# Altium PCB Alarm system.PcbDoc
Units mm, origin at the board's own origin, x right, y up, seen from the top; angles counter-clockwise.
Board outline 55 x 35 mm, 2 copper layers (Top Layer, Bottom Layer); 31 components, 37 nets, 124 pads, 53 vias.
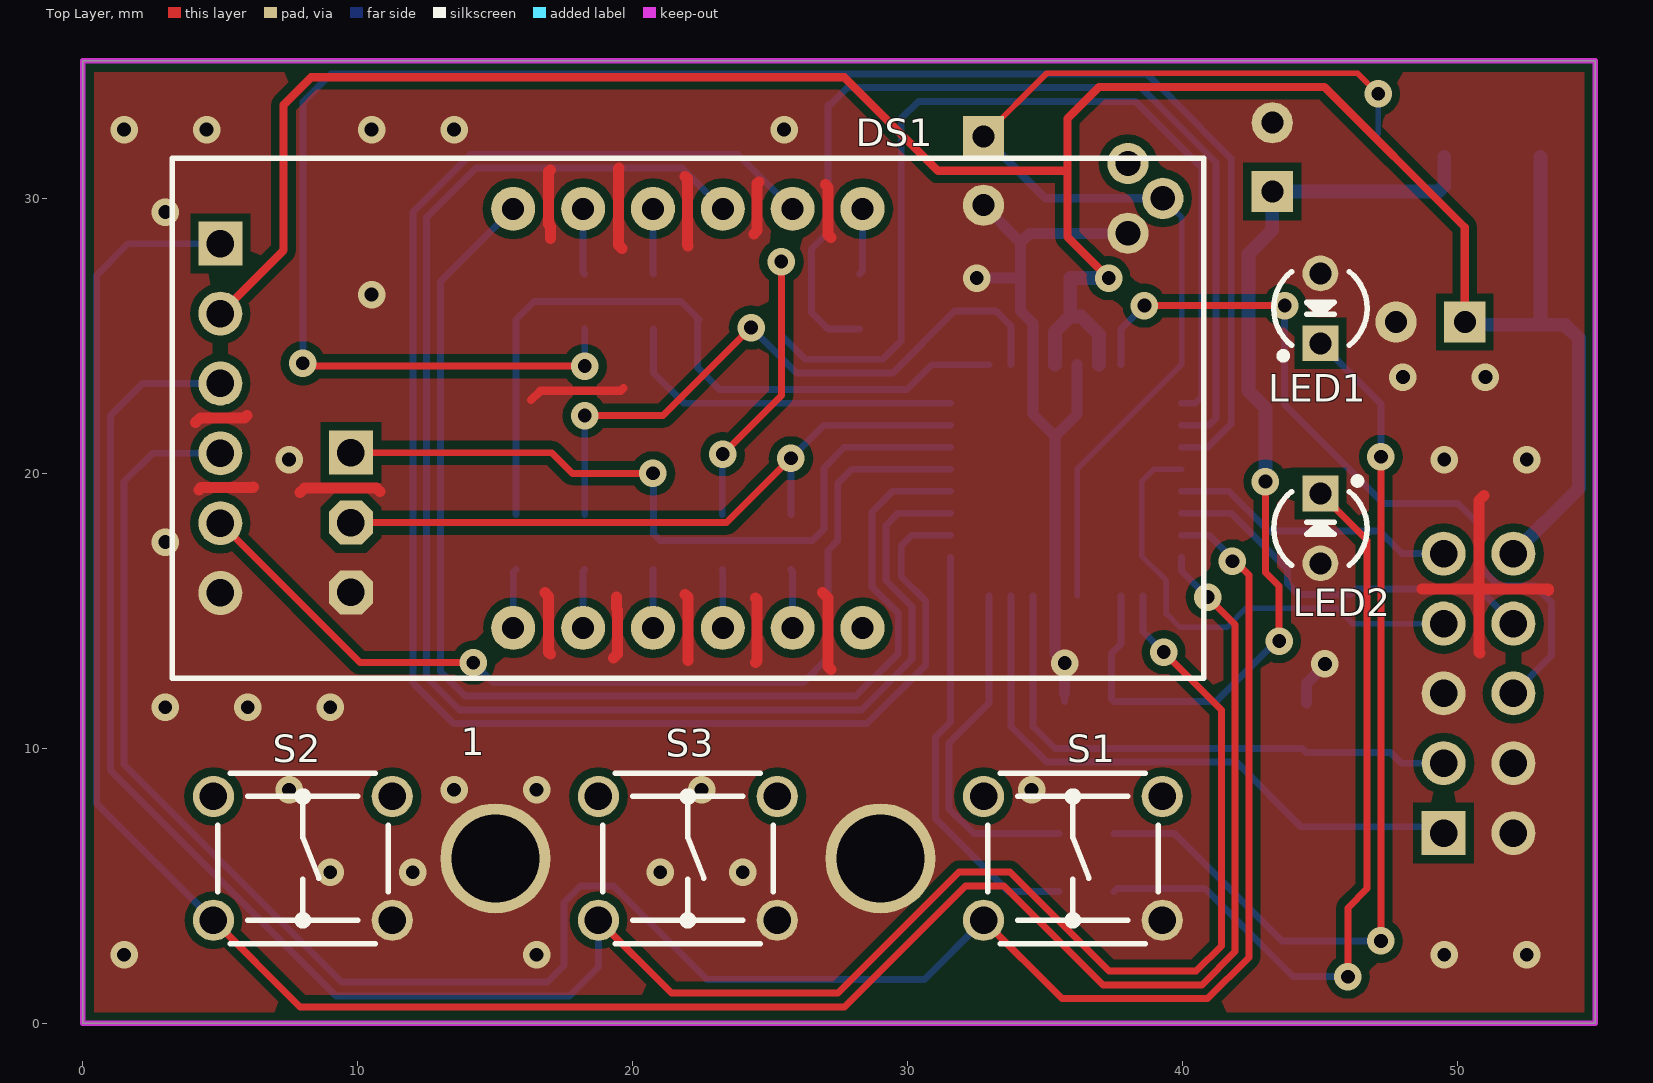
[diagram p0: Top Layer view]
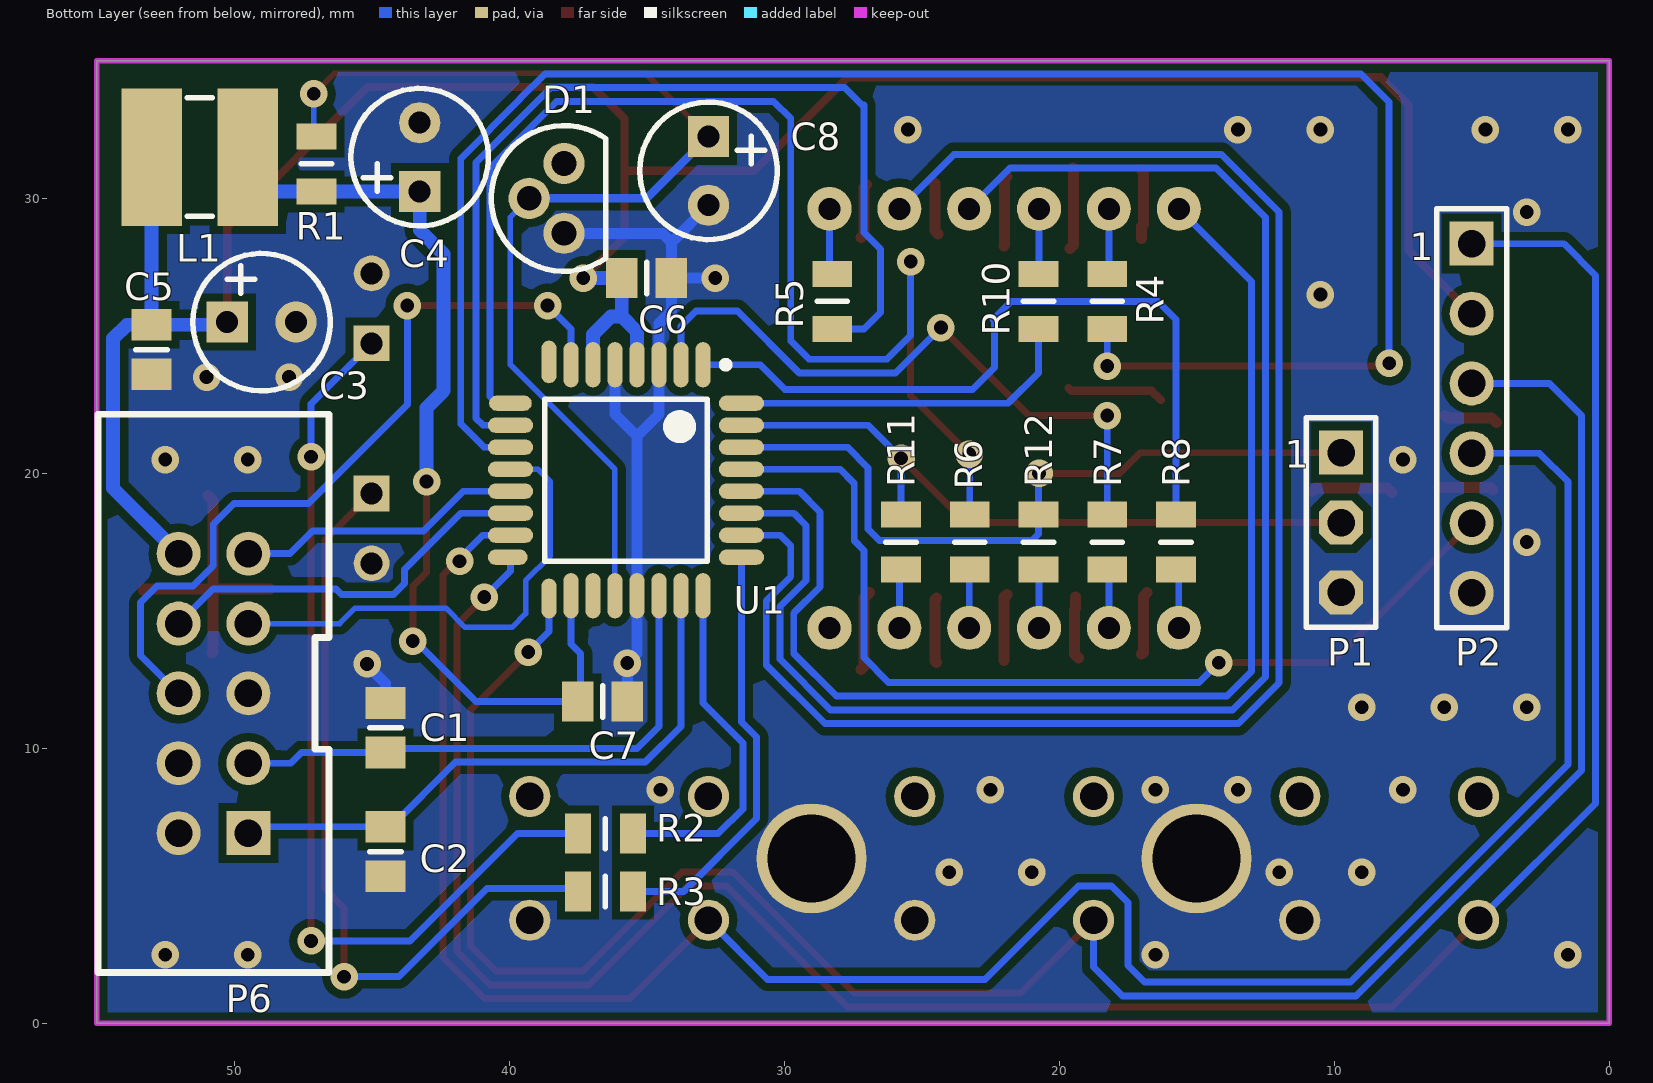
[diagram p1: Bottom Layer view, seen from below]
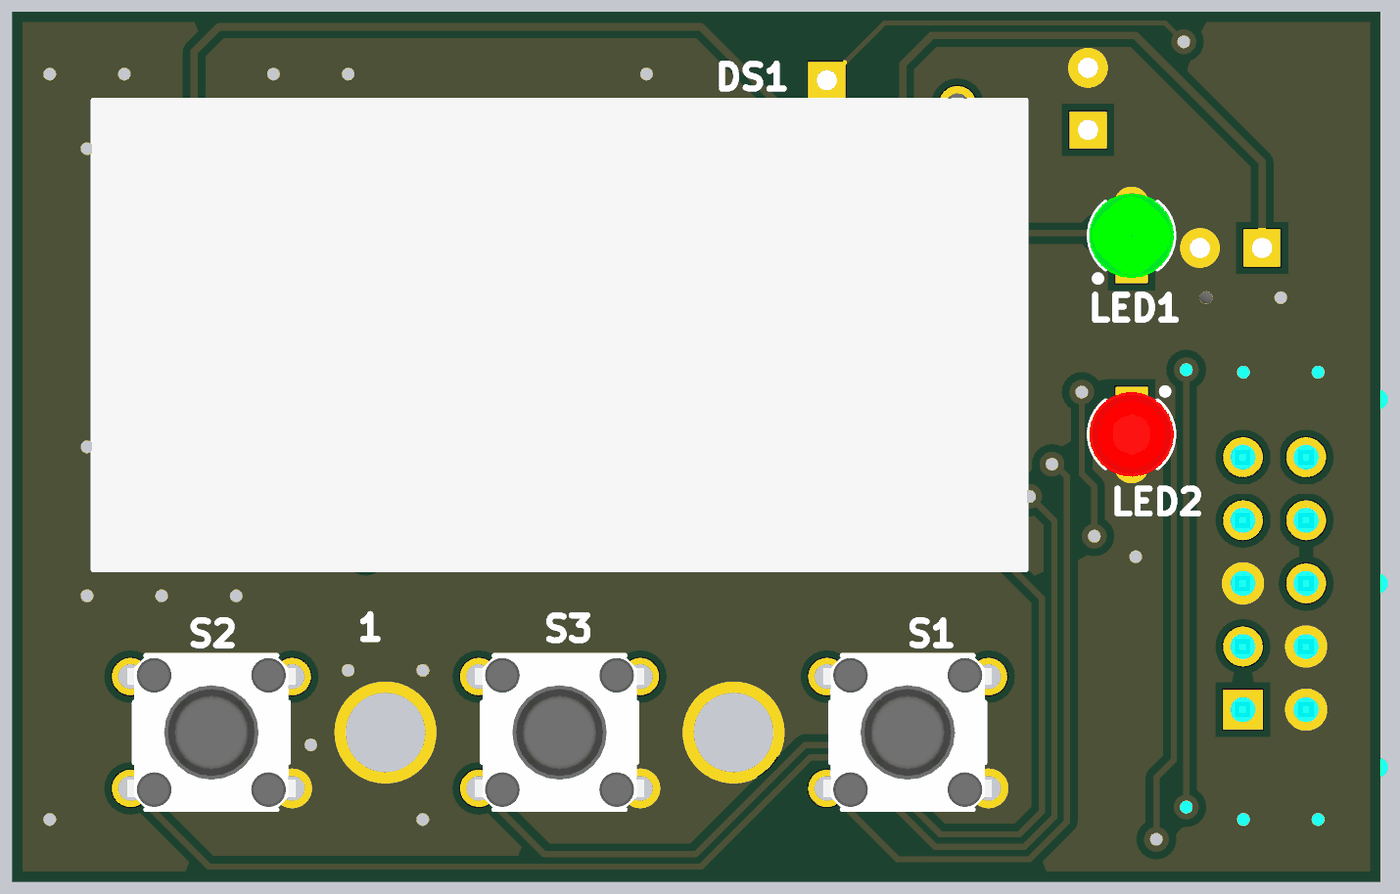
[diagram p2: 3D render of the assembled board from above, using the file's embedded part models]
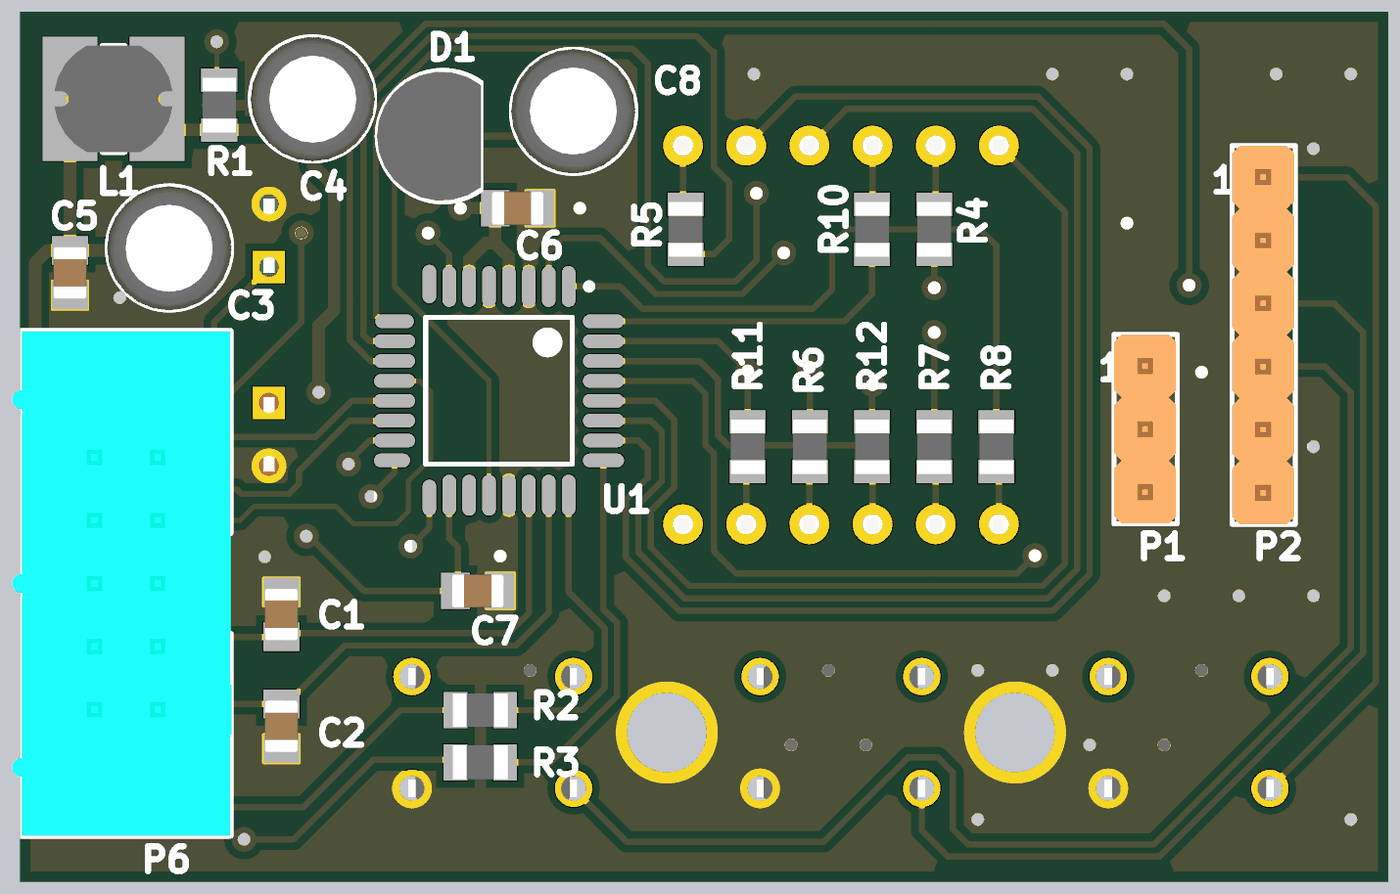
[diagram p3: 3D render of the assembled board from below, using the file's embedded part models]

## Layer stack, top to bottom
Top Solder: solder mask 0.0102, Solder Resist, Dk 3.5
Top Layer: signal copper 0.0356
Dielectric1: dielectric 0.32, FR-4, Dk 4.8
Bottom Layer: signal copper 0.0356
Bottom Solder: solder mask 0.0102, Solder Resist, Dk 3.5

## Board outline
0,0 55,0 55,35 0,35

## Design rules (kind name [scope] priority, off if disabled: settings)
Clearance [All] p1: gap=0.25 except(0.3: Arc-Poly Track-Poly SMDPad-Poly THPad-Poly Via-Poly Fill-Poly Poly-Poly)
ComponentClearance [All] p1 off: gap=0.254 collisioncheckmode=3 verticalgap=0.254 showdistances=FALSE
Height [All] p1: minheight=0 maxheight=30 prefheight=12.7
MinimumSolderMaskSliver [All] p1: minsoldermaskwidth=0.1
PolygonConnect [All] p1: connectstyle=Direct reliefconductorwidth=0.254 reliefentries=4 polygonreliefangle="90 Angle" airgapwidth=0.254
RoutingVias [All] p1: holewidth=0.5 width=1 viastyle="Through Hole" minholewidth=0.5 minwidth=1 maxholewidth=0.711 maxwidth=1.27
SilkToSilkClearance [All] p1 off: silktosilkclearance=0.1
SilkToSolderMaskClearance SilkscreenOverComponentPads [IsPad] p1 off: minsilkscreentomaskgap=0.05 clearancetoexposedcopper=TRUE
SolderMaskExpansion [All] p1: expansion=0.05
Width [All] p1: maxlimit=2 minlimit=0.2 preferedwidth=0.35 minimp=50.000000 maximp=50.000000 favimp=50.000000
25 further rules are at their usual default settings.

## Components (designator, comment, footprint, x,y, rotation, side; value= is the part's Value field where it differs from the comment)
C1 "0805" CAPC2012X110N 44.5,10.75 r270 bottom
C2 "0805" CAPC2012X110N 44.5,6.25 r90 bottom
C3 "CAP_POL" CAPPR250-500X1100 49,25.5 r180 bottom
C4 "CAP_POL" CAPPR250-500X1100 43.25,31.5 r90 bottom
C5 "0805" CAPC2012X110N 53,24.5 r90 bottom
C6 "0805" CAPC2012X110N 35,27.1 r0 bottom
C7 "0805" CAPC2012X110N 36.6,11.7 r0 bottom
C8 "CAP_POL" CAPPR250-500X1100 32.75,31 r270 bottom
D1 "LM385Z-2.5" TO-92AA-P127 38,30 r90 bottom
DS1 "BT-M51DRD" BT-M51DRD 22,22 r0 top locked
L1 "22uH" IND_BOURNS_PM43 51.25,31.5 r0 bottom
LED1 "GREEN" LED_3MM_GREEN_1C-2A 45,26 r90 top locked
LED2 "RED" LED_3MM_RED_1C-2A 45,18 r270 top locked
P1 "UART" 961103-6404-AR 9.75,20.75 r270 bottom
P2 "ISP" 961106-6404-AR 5,22 r270 bottom
P6 "Header 5X2" 30310-6002HB 50.75,12 r90 bottom
R1 "0805" RESC2012X50N 47,31.25 r90 bottom
R2 "0805" RESC2012X50N 36.5,6.9 r0 bottom
R3 "0805" RESC2012X50N 36.5,4.8 r0 bottom
R4 "0805" RESC2012X50N 18.25,26.25 r90 bottom
R5 "0805" RESC2012X50N 28.25,26.25 r90 bottom
R6 "0805" RESC2012X50N 23.25,17.5 r270 bottom
R7 "0805" RESC2012X50N 18.25,17.5 r270 bottom
R8 "0805" RESC2012X50N 15.75,17.5 r270 bottom
R10 "0805" RESC2012X50N 20.75,26.25 r90 bottom
R11 "0805" RESC2012X50N 25.75,17.5 r270 bottom
R12 "0805" RESC2012X50N 20.75,17.5 r270 bottom
S1 "PLUS" PB_OMRON_B3F-1070 36,6 r180 top locked
S2 "MINUS" PB_OMRON_B3F-1070 8,6 r180 top locked
S3 "SEL/OK" PB_OMRON_B3F-1070 22,6 r180 top locked
U1 "ATmega8A-AU" 32A_N 35.75,19.75 r270 bottom

## Footprints (in the part's own frame and the unit in brackets; to place one, negate y for a bottom-side part, rotate by r counter-clockwise, add the part's x,y. Pads: shape width x height; smd on the part's side, far side on the other; paste and mask are expansions set on the pad)
32A_N [mm] "Thin QFP, 32-Leads, Body 7x7mm, Pitch 0.8mm, IPC Medium Density"
  oval 1.65x0.55 smd: 1(-4.2,2.8) 2(-4.2,2) 3(-4.2,1.2) 4(-4.2,0.4) 5(-4.2,-0.4) 6(-4.2,-1.2) 7(-4.2,-2) 18(4.2,-2) 19(4.2,-1.2) 20(4.2,-0.4) 21(4.2,0.4) 22(4.2,1.2) 23(4.2,2) 24(4.2,2.8)
  oval 1.55x0.55 smd: 8(-4.3,-2.8)
  oval 0.55x1.55 smd: 9(-2.8,-4.2)
  oval 0.55x1.65 smd: 10(-2,-4.2) 11(-1.2,-4.2) 12(-0.4,-4.2) 13(0.4,-4.2) 14(1.2,-4.2) 15(2,-4.2) 25(2.8,4.2) 26(2,4.2) 27(1.2,4.2) 28(0.4,4.2) 29(-0.4,4.2) 30(-1.2,4.2) 31(-2,4.2) 32(-2.8,4.2)
  oval 0.55x1.45 smd: 16(2.8,-4.3)
  oval 1.45x0.55 smd: 17(4.3,-2.8)
  silkscreen extent -4.32,-2.95 2.95,3.75, body extent -3.5,-3.5 3.5,3.5, height 1.2
30310-6002HB [mm] "10 Positions Header Connector 0.100\" (2.54mm) Through Hole Gold"
  rect 1.6x1.6 hole 1: 1(-5.08,-1.27)
  round 1.6 hole 1: 2(-5.08,1.27) 3(-2.54,-1.27) 4(-2.54,1.27) 5(0,-1.27) 6(0,1.27) 7(2.54,-1.27) 8(2.54,1.27) 9(5.08,-1.27) 10(5.08,1.27)
  silkscreen extent -10.15,-4.2 10.15,4.2, body extent -10.15,-4.25 10.14,4.56, height 8.89
961103-6404-AR [mm] "3 Positions Header, Unshrouded Connector 0.100\" (2.54mm) Through Hole Gold"
  rect 1.6x1.6 hole 1: 1(0,0)
  oct 1.6x1.6 hole 1: 2(2.54,0) 3(5.08,0)
  silkscreen extent -1.27,-1.27 6.35,1.27, body extent -1.27,-1.27 6.35,1.23, height 8.14
961106-6404-AR [mm] "6 Positions Header, Unshrouded Connector 0.100\" (2.54mm) Through Hole Gold"
  rect 1.6x1.6 hole 1: 1(-6.35,0)
  round 1.6 hole 1: 2(-3.81,0) 3(-1.27,0) 4(1.27,0) 5(3.81,0) 6(6.35,0)
  silkscreen extent -7.62,-1.27 7.62,1.27, body extent -7.62,-1.27 7.62,1.23, height 8.1
BT-M51DRD [mm]
  round 1.6 hole 0.8: 1(-6.35,-7.62) 2(-3.81,-7.62) 3(-1.27,-7.62) 4(1.27,-7.62) 5(3.81,-7.62) 6(6.35,-7.62) 7(6.35,7.62) 8(3.81,7.62) 9(1.27,7.62) 10(-1.27,7.62) 11(-3.81,7.62) 12(-6.35,7.62)
  silkscreen extent -18.75,-9.45 18.75,9.45, body extent -18.8,-9.5 18.8,9.5, height 8
CAPC2012X110N [mm] "Chip Capacitor, Body 2.0x1.25mm, IPC Medium Density"
  rect 1.15x1.45 smd: 1(-0.9,0) 2(0.9,0)
  silkscreen extent 0,-0.57 0,0.57, body extent -1.05,-0.67 1.05,0.68, height 1.1
CAPPR250-500X1100 [mm] "Capacitor, Radial, Pin spacing 2.5mm - Body Diameter 5.0mm X Body Height 11mm"
  rect 1.5x1.5 hole 0.8: 1(-1.25,0)
  round 1.5 hole 0.8: 2(1.25,0)
  silkscreen extent -2.5,-2.5 2.5,2.5, body extent -2.51,-2.51 2.49,2.49, height 10.9
IND_BOURNS_PM43 [mm] "SMD Inductor  Body Width 4.5mm Body Lenght 4mm Height 3.5mm"
  rect 2.2x5 smd: 1(-1.75,0) 2(1.75,0)
  silkscreen extent -0.45,-2.15 0.45,2.15, body extent -2.38,-2.15 2.38,2.15, height 3.5
LED_3MM_GREEN_1C-2A [mm] "LED, Green, Body Dia. 3.43 mm, Pin spacing 2.54mm"
  rect 1.3x1.3 hole 0.8: 1(-1.27,0)
  round 1.3 hole 0.8: 2(1.27,0)
  silkscreen extent -1.85,-1.7 1.34,1.7, body extent -1.71,-1.71 1.72,1.72, height 9.85
LED_3MM_RED_1C-2A [mm] "LED, Red, Body Dia. 3.43 mm, Pin spacing 2.54mm"
  rect 1.3x1.3 hole 0.8: 1(-1.27,0)
  round 1.3 hole 0.8: 2(1.27,0)
  silkscreen extent -1.85,-1.7 1.34,1.7, body extent -1.71,-1.71 1.72,1.72, height 9.85
PB_OMRON_B3F-1070 [mm] "6x6mm Model, Horizontal, Flat Plunger Type (without Ground Terminal) Pushbutton Switch, OMRON B3F Series"
  round 1.5 hole 1: 1(-3.25,2.25) 2(3.25,2.25) 3(-3.25,-2.25) 4(3.25,-2.25)
  silkscreen extent -3.1,-3.1 3.1,3.1, body extent -3.4,-3.1 3.4,3.1, height 9.5
RESC2012X50N [mm] "Chip Resistor, EIA 0805, Metric 2012, Body 2.0x1.25mm, IPC Medium Density"
  rect 0.95x1.45 smd: 1(-1,0) 2(1,0)
  silkscreen extent 0,-0.55 0,0.55, body extent -1.1,-0.67 1.1,0.68, height 0.5
TO-92AA-P127 [mm] "TO-92 (TO-226),  Pitch 1.27mm, Flat Index, 3 In-Line, Axial Leads, Body Dia. 5.3mm, Leads Dia. 0.5mm (max)"
  round 1.5 hole 0.9: 1(-1.27,0) 2(0,1.27) 3(1.27,0)
  silkscreen extent -2.65,-1.52 2.65,2.65, body extent -2.6,-1.53 2.6,2.66, height 9.33

## Part data
C1 C2 C5 C6 C7: library part CAP
D1: "Micropower Voltage Reference Diode"
DS1: library part Led_Ind_3_Digit
L1: library part Drossel_AX
LED1 LED2: library part LED0, "Typical INFRARED GaAs LED"
P1: library part "Header 3", "Header, 3-Pin"
P2: library part "Header 6", "Header, 6-Pin"
P6: "Header, 5-Pin, Dual row"
R1 R2 R3 R4 R5 R6 R7 R8 R10 R11 R12: library part Resistor
S1 S2 S3: library part SW-PB, "Switch"
U1: "8-bit AVR Microcontroller, 8KB Flash, 512 Bytes EEPROM, 1KB SRAM, 32-pin TQFP, Industrial Grade (-40°C to 85°C)"

## Free pads (board coordinates)
  round 4 hole 3.2: 0(15,6) 0(29,6)

## Via types
v1: diameter 1, hole 0.5, Top Layer to Bottom Layer, tented both sides, 53 vias

## Nets (pads, with @x,y where several pads share a name; then routed paths per layer and width w, separated by ;. In a path a pad name is that pad's centre, name@x,y a point inside that pad or via, vN(x,y) a via of type N, cw(c..) or ccw(c..) an arc to the next point about the centre after c; other vN are vias at no path point)
+5V: C3.1 C5.2 C6.2 L1.2 P2.2 P6.10 U1.4 U1.6 | length 92.5
  Top Layer w0.3: P2.2 7.3,28.11 7.3,33.4 8.3,34.4 27.7,34.4 31.1,31 35.8,31 ; v1(37.3,27.1) 35.8,28.6 35.8,31 ; C3.1 50.25,28.95 45.15,34.05 36.95,34.05 35.8,32.9 35.8,31
  Top Layer w0.5: v1(37.3,27.1) v1@37.435,27.235
  Bottom Layer w0.5: U1.4 35.35,25.15 35.9,25.7 ; U1.6 36.95,25.05 36.3,25.7 35.9,25.7 ; v1(37.3,27.1) C6.2 35.9,25.7 ; C3.1 50.35,25.4 C5.2 ; P6.10 54.4,19.46 54.4,24.9 53.9,25.4 C5.2 ; L1.2 C5.2
ADC1: C2.2 P6.1 U1.23 | length 22.1
  Bottom Layer w0.25: U1.23 33.75,10.8 35.05,9.5 41.95,9.5 44.3,7.15 C2.2 49.25,7.15 P6.1
ADC2: C1.2 P6.3 U1.22 | length 20.2
  Bottom Layer w0.25: U1.22 34.55,10.8 35.35,10 44.35,10 C1.2 47.55,9.85 47.94,9.46 P6.3
AVCC: C4.1 C7.2 L1.1 R1.1 U1.18 | length 35.5
  Top Layer w0.25: v1(43,19.7) 43,16.4 43.5,15.9 v1(43.5,13.9)
  Bottom Layer w0.25: U1.18 37.75,13.8 37.4,13.45 37.4,11.8 C7.2 41.2,11.7 43.4,13.9 v1(43.5,13.9)
  Bottom Layer w0.5: v1(43,19.7) 43,22.382 42.382,23 42.382,27.982 43.25,28.85 C4.1 R1.1 49.3,30.25 49.5,30.45 L1.1
BUZZ: P6.8 U1.14 | length 14.2
  Bottom Layer w0.25: U1.14 41.753,18.55 43.8,16.503 43.8,16 44.2,15.6 46.1,15.6 46.3,15.8 50.76,15.8 P6.8
GND: C1.1 C2.1 C3.2 C4.2 C5.1 C6.1 C7.1 C8.2 D1.1 LED1.2 LED2.2 P1.3 P2.6 P6.2 P6.4 P6.5 pad.0 S1.1 S2.1 S3.1 U1.3 U1.5 U1.21 | length 75
  Top Layer w0.3: 16.3,22.664 16.636,23 19.558,23 19.658,23.1
  Top Layer w0.4: 4.1,21.85 4.27,22.02 5.881,22.02 5.961,22.1 ; 4.22,19.4 4.3,19.48 6.18,19.48 6.2,19.5 ; 7.9,19.3 8.06,19.46 10.673,19.46 10.8,19.333 ; 16.8,15.67 16.94,15.53 16.94,13.487 17,13.427 ; 17,28.548 17,28.982 16.94,29.042 16.94,30.978 17,31.038 ; 19.3,13.287 19.44,13.427 19.44,15.038 19.4,15.078 19.4,15.5 ; 19.5,31.1 19.48,31.08 19.48,28.299 19.6,28.179 ; 21.9,15.6 22,15.5 22,13.2 ; 21.9,30.8 21.98,30.72 21.98,28.296 22,28.276 ; 24.4,28.713 24.52,28.833 24.52,30.537 24.583,30.6 ; 24.457,15.47 24.52,15.407 24.52,13.17 24.468,13.118 ; 26.9,15.67 27.1,15.47 27.1,12.974 27.2,12.874 ; 27,30.5 27.1,30.4 27.1,28.669 27.2,28.569 ; 48.7,15.8 50.77,15.8 ; 50.8,13.468 50.77,13.498 50.77,15.8 ; 50.948,19.2 50.77,19.022 50.77,15.8 ; 53.3,15.8 53.3,15.744 53.244,15.8 50.77,15.8
  Bottom Layer w0.25: C7.1 C7.1@35.7,12
  Bottom Layer w0.4: v1(32.5,27.1) C6.1 ; C8.2 34.1,28.4 ; C7.1@35.7,12 v1(35.7,13.1) 35.35,13.45 U1.21 35.35,21.35 ; U1.5 36.15,22.15 35.35,21.35 ; D1.1 34.43,28.73 34.1,28.4 ; C1.1 44.5,12.361 45.167,13.028 v1(45.167,13.072) ; C6.1 34.1,28.4 ; C6.1 34.1,25.9 34.55,25.45 U1.3 34.55,22.15 35.35,21.35
  other v1: 1.5,2.5 16.5,2.5 49.5,2.5 52.5,2.5 9,5.5 12,5.5 21,5.5 24,5.5 7.5,8.5 13.5,8.5 16.5,8.5 22.5,8.5 34.5,8.5 3,11.5 6,11.5 9,11.5 3,17.5 7.5,20.5 49.5,20.5 52.5,20.5 48,23.5 51,23.5 10.5,26.5 3,29.5 1.5,32.5 4.5,32.5 10.5,32.5 13.5,32.5 25.5,32.5
HTR: P6.9 U1.13 | length 10.5
  Bottom Layer w0.25: U1.13 41.66,19.35 43.11,17.9 47.15,17.9 47.97,17.08 P6.9
KB_MN: P2.1 S2.2 U1.16 | length 87.6
  Top Layer w0.25: S2.2 7.9,0.6 27.7,0.6 32.1,5 33.5,5 37.1,1.4 40.693,1.4 41.9,2.607 41.9,14.5 v1(40.9,15.5)
  Bottom Layer w0.25: S2.2 0.5,8 0.5,27.2 1.65,28.35 P2.1 ; U1.16@39.95,16.95 39.95,16.45 v1(40.9,15.5)
KB_PL: P2.4 S1.2 U1.15 | length 81.9
  Top Layer w0.25: S1.2 35.6,0.9 40.9,0.9 42.4,2.4 42.4,16.3 41.9,16.8 v1(41.8,16.8)
  Bottom Layer w0.25: P2.4 2.53,20.73 1.5,19.7 1.5,9.407 9.407,1.5 16.9,1.5 17.5,2.1 17.5,4.4 18.1,5 19.3,5 22.7,1.6 30.6,1.6 S1.2 ; U1.15 40.95,17.75 v1@41.6,17.1
KB_SL: P2.3 S3.2 U1.17 | length 82
  Top Layer w0.25: S3.2 21.4,1.1 27.459,1.1 31.859,5.5 33.707,5.5 37.307,1.9 40.486,1.9 41.4,2.814 41.4,11.4 v1(39.3,13.5)
  Bottom Layer w0.25: P2.3 2.17,23.27 1,22.1 1,9.2 9.2,1 17.7,1 18.75,2.05 S3.2 ; U1.17@38.55,15.55 38.55,14.25 v1(39.3,13.5)
LED_A: R4.1 U1.11 | length 68.4
  Top Layer w0.25: v1(8,24) 8.1,23.9 v1(18.25,23.9)
  Bottom Layer w0.25: v1(8,24) 8,33.5 9.025,34.525 38.7,34.525 39.6,33.625 39.6,33.614 41.757,31.457 41.757,21.8 40.907,20.95 U1.11 ; v1(18.25,23.9) R4.1
LED_B: R5.1 U1.10 | length 35.9
  Bottom Layer w0.25: R5.1 27.1,25.25 26.5,25.85 26.5,28.15 27.1,28.75 27.1,33.4 27.175,33.4 27.8,34.025 38.482,34.025 41.2,31.307 41.2,22 40.95,21.75 U1.10
LED_C: R6.1 U1.9 | length 47.2
  Top Layer w0.25: v1(23.27,20.7) 25.4,22.83 v1(25.4,27.7)
  Bottom Layer w0.25: R6.1 23.25,20.68 v1(23.27,20.7) ; v1(25.4,27.7) 25.4,25.007 26.257,24.15 29.1,24.15 29.757,24.807 29.757,32.9 30.382,33.525 38.275,33.525 40.7,31.1 40.7,22.8 40.45,22.55 U1.9
LED_CA1: DS1.12 U1.28 | length 44.3
  Bottom Layer w0.25: DS1.12 13,26.97 13,12.8 13.9,11.9 28.1,11.9 29.65,13.45 29.65,14.914 28.7,15.864 28.7,18.6 29.45,19.35 U1.28
LED_CA2: DS1.9 U1.27 | length 55.5
  Bottom Layer w0.25: DS1.9 21.79,31.1 14.3,31.1 12.5,29.3 12.5,12.593 13.693,11.4 28.307,11.4 30.15,13.243 30.15,15.157 29.2,16.107 29.2,18.1 29.65,18.55 U1.27
LED_CA3: DS1.8 U1.26 | length 59.4
  Bottom Layer w0.25: DS1.8 23.83,31.6 14.093,31.6 12,29.507 12,12.386 13.486,10.9 28.514,10.9 30.65,13.036 30.65,15.364 29.757,16.257 29.757,17.357 30.15,17.75 U1.26
LED_D: R7.1 U1.2 | length 23.7
  Top Layer w0.25: v1(18.25,22.1) 21.1,22.1 v1(24.3,25.3)
  Bottom Layer w0.25: R7.1 v1(18.25,22.1) ; v1(24.3,25.3) 25.95,23.65 29.45,23.65 31.7,25.9 33.2,25.9 33.75,25.35 U1.2
LED_DP: P1.1 R12.1 U1.30 | length 27.1
  Top Layer w0.25: P1.1 17.05,20.75 17.8,20 v1(20.73,20)
  Bottom Layer w0.25: v1(20.73,20) 20.75,19.98 R12.1 20.75,17.8 20.99,17.56 26.541,17.56 26.95,17.97 26.95,20.2 27.7,20.95 U1.30
LED_E: R8.1 U1.1 | length 27.4
  Bottom Layer w0.25: R8.1 15.75,25.6 16.4,26.25 21.75,26.25 22.35,25.65 ; 22.4,25.6 22.35,25.65 ; U1.1 30.875,23.95 29.975,23.05 23.15,23.05 22.35,23.85 22.35,25.65
LED_F: R10.1 U1.32 | length 12.9
  Bottom Layer w0.25: R10.1 20.75,23.65 21.85,22.55 U1.32
LED_G: P1.2 R11.1 U1.31 | length 25.3
  Top Layer w0.25: P1.2 23.41,18.21 v1(25.75,20.55)
  Bottom Layer w0.25: R11.1 v1(25.75,20.55) 26.95,21.75 U1.31
NetDS1_1: DS1.1 R8.2 | length 2.2
  Bottom Layer w0.25: DS1.1 15.65,16.4 R8.2
NetDS1_2: DS1.2 R7.2 | length 2.1
  Bottom Layer w0.25: DS1.2 18.19,16.44 R7.2
NetDS1_3: DS1.3 R12.2 | length 2.1
  Bottom Layer w0.25: DS1.3 20.73,16.48 R12.2
NetDS1_4: DS1.4 R6.2 | length 2.1
  Bottom Layer w0.25: R6.2 23.27,16.48 DS1.4
NetDS1_5: DS1.5 R11.2 | length 2.1
  Bottom Layer w0.25: R11.2 25.81,16.44 DS1.5
NetDS1_7: DS1.7 R5.2 | length 2.4
  Bottom Layer w0.25: R5.2 28.35,27.35 DS1.7
NetDS1_10: DS1.10 R10.2 | length 2.4
  Bottom Layer w0.25: DS1.10 20.73,27.27 R10.2
NetDS1_11: DS1.11 R4.2 | length 2.4
  Bottom Layer w0.25: DS1.11 18.19,27.31 R4.2
NetLED1_1: LED1.1 R2.2 | length 34
  Top Layer w0.25: v1(47.2,3) v1(47.2,20.6)
  Bottom Layer w0.25: R2.2 39.7,6.9 43.6,3 v1(47.2,3) ; LED1.1 47.2,22.53 v1(47.2,20.6)
NetLED2_1: LED2.1 R3.2 | length 28.4
  Top Layer w0.25: LED2.1 46.7,17.57 46.7,4.9 46,4.2 v1(46,1.7)
  Bottom Layer w0.25: R3.2 37.6,4.9 40.8,4.9 44,1.7 v1(46,1.7)
RST: P2.5 U1.29 | length 35.7
  Top Layer w0.25: P2.5 10.072,13.118 v1(14.2,13.118)
  Bottom Layer w0.25: v1(14.2,13.118) 14.918,12.4 26.2,12.4 27.1,13.3 27.1,17.2 27.45,17.55 27.45,19.635 27.965,20.15 U1.29
SLED_G: R2.1 U1.24 | length 12.7
  Bottom Layer w0.25: U1.24 32.95,11.65 31.5,10.2 31.5,7.8 32.4,6.9 R2.1
SLED_R: R3.1 U1.25 | length 15.3
  Bottom Layer w0.25: U1.25 31.55,10.957 31,10.407 31,7.45 33.65,4.8 R3.1
TC/TR: P6.7 U1.12 | length 17.6
  Bottom Layer w0.2: U1.12 38.95,20.15 38.5,19.7 38.5,17 39.4,16.1 39.4,14.9 39.9,14.4 41.6,14.4 42.3,15.1 45.6,15.1 46.16,14.54 P6.7
VREF: C8.1 D1.2 R1.2 U1.20 | length 41
  Top Layer w0.2: C8.1 35.05,34.55 46.35,34.55 v1(47.1,33.8)
  Bottom Layer w0.2: U1.20 36.15,20.15 39.95,23.95 39.95,29.32 D1.2 ; R1.2 47.1,32.35 v1(47.1,33.8)
  Bottom Layer w0.3: C8.1 35,30 D1.2
VRS: P6.6 U1.7 | length 28.6
  Top Layer w0.25: v1(38.6,26.1) v1(43.7,26.1)
  Bottom Layer w0.25: U1.7 37.75,25.25 v1(38.6,26.1) ; v1(43.7,26.1) 43.7,22.5 47.3,18.9 50,18.9 50.76,18.14 50.76,16.64 51.5,15.9 52.8,15.9 53.4,15.3 53.4,13.38 P6.6
pads on no net: D1.3 DS1.6 S1.3 S1.4 S2.3 S2.4 S3.3 S3.4 U1.8 U1.19

## Polygon pours and split planes (outlines as drawn)
GND on Bottom Layer "GND_L02_P000" (solid, remove dead copper, pour order 0): 55,0 0,0 0,35 55,35
GND on Top Layer "GND_L01_P002" (solid, remove dead copper, pour order 2): 55,0 55,35 0,35 0,0

## Keep-outs
Keep-Out Layer:
  the board outline again, w0.2

## Other copper
Bottom Layer:
  pour cut-out: 50.552,34 50.5,33.948 50.5,29 52.417,29 52.981,29.564 52.981,34

## Text inside footprints (layer, text, board x,y; h text height)
DS1: Top Overlay "1" at 13.75,9.75 h1
P1: Bottom Overlay "1" at 11.8,20.2 h1
P2: Bottom Overlay "1" at 7.25,27.75 h1